# EAGLE board PartiBadge-v2 (EAGLE 9.1.0)
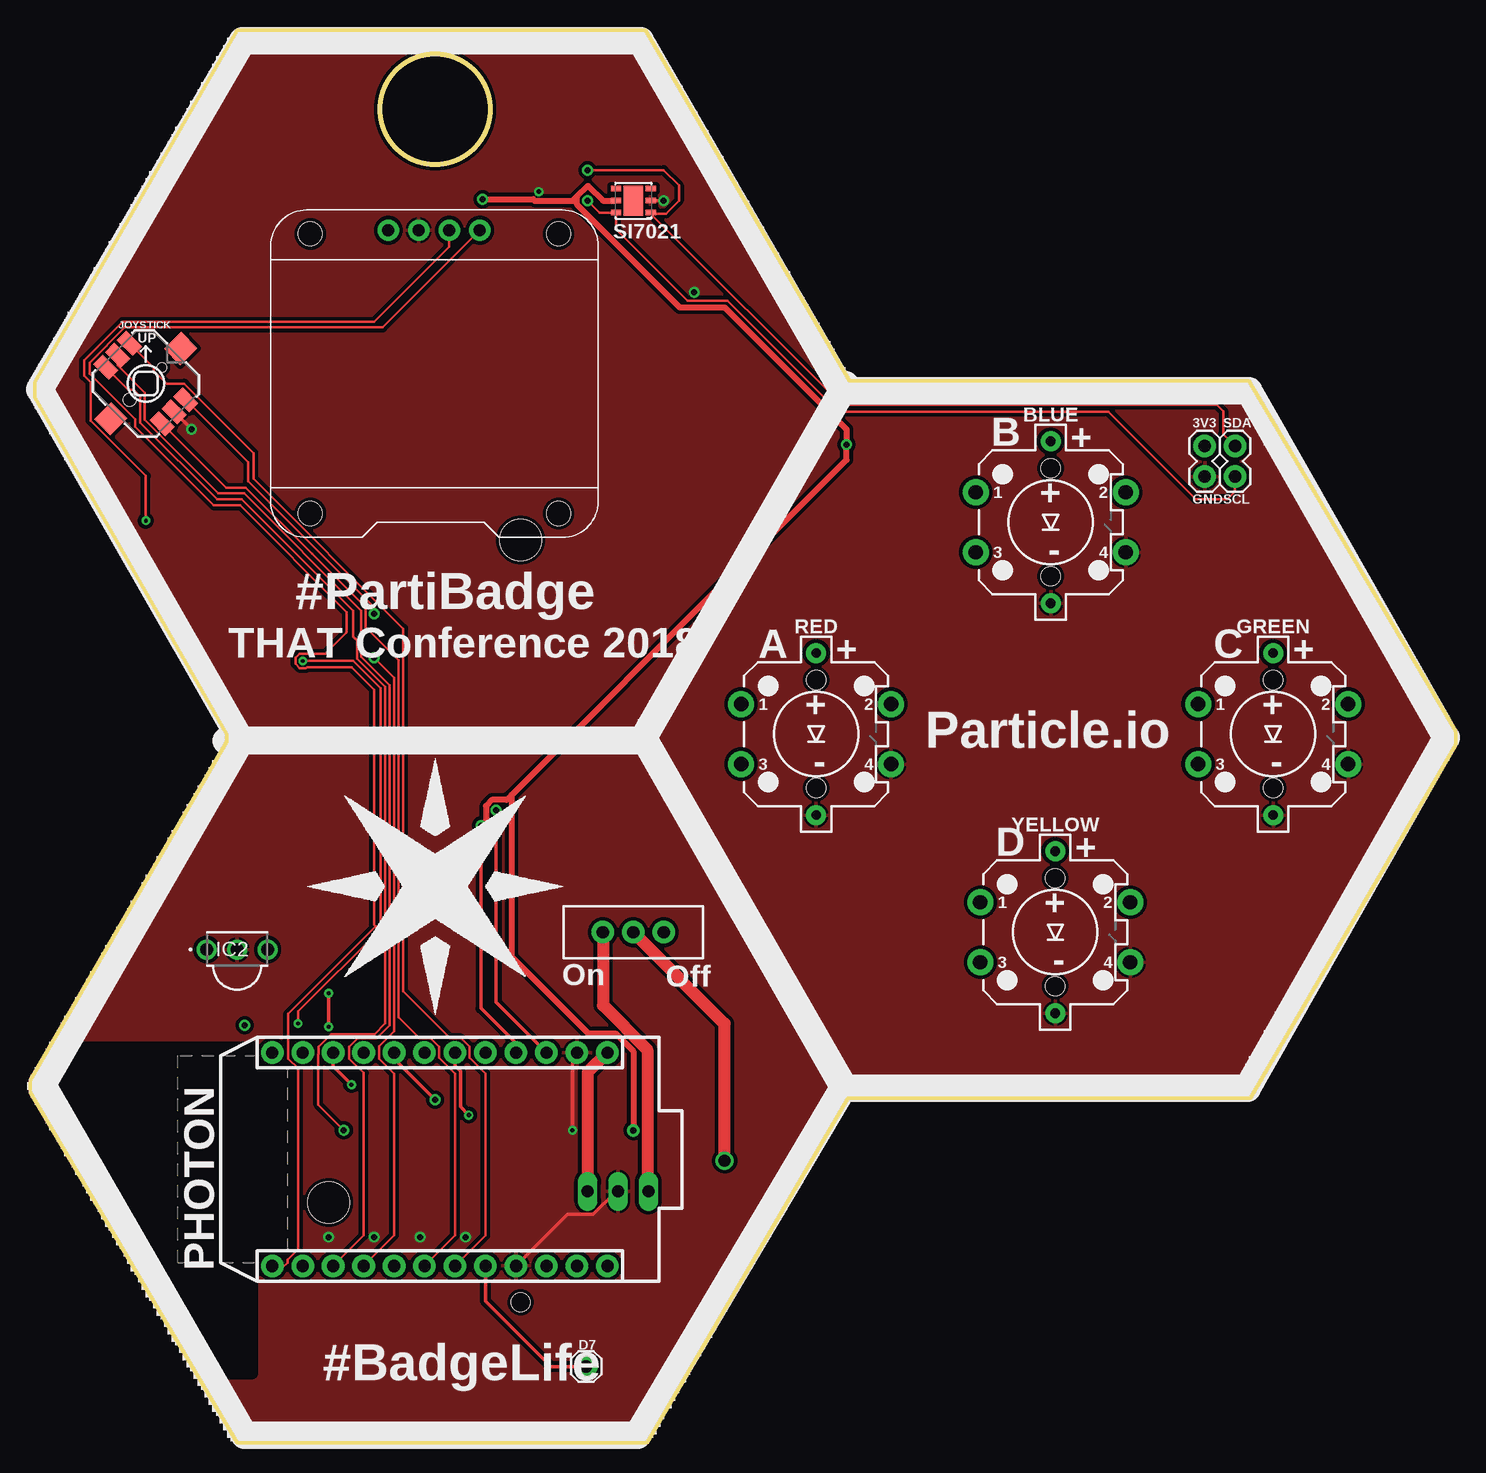
[diagram p0: board, top side]
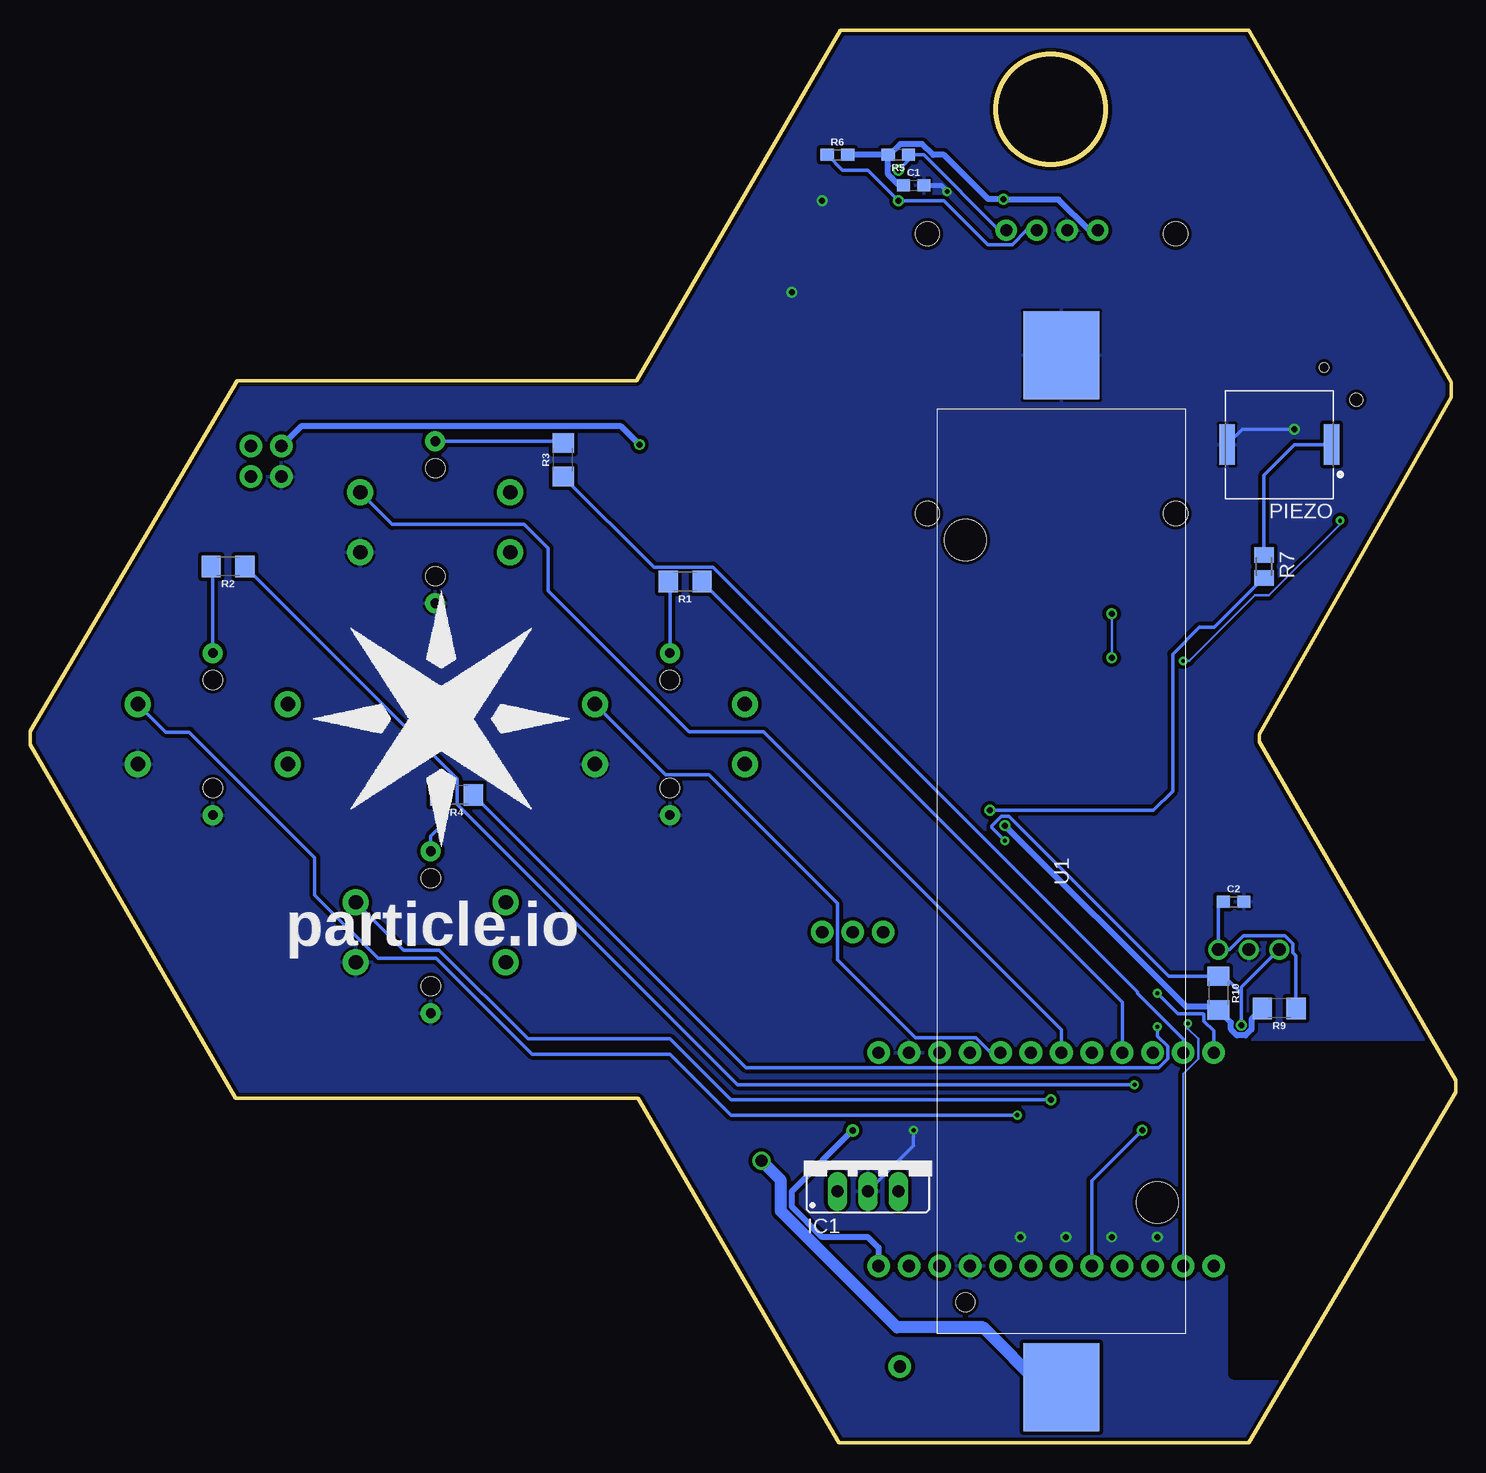
[diagram p1: board, bottom side, seen from below]

Size 118.87 x 117.73 mm. Coordinates in mm from the lower left corner, seen from the top.
Outline: 16.38,59.05 0.38,87.12 0.38,88.39 17.27,117.73 51.31,117.73 68.33,88.52 101.6,88.52 118.87,59.31 118.87,58.17 101.73,28.7 68.2,28.7 51.44,0 17.27,0 0,29.21 0,30.23 16.38,58.42 16.38,59.05
Outline: circle at 33.78,111.12 radius 4.58
Copper layers (1+2*15+16): Top 0.018mm / dielectric 0.195mm / Route2 0.035mm / dielectric 1.1mm / Route15 0.035mm / dielectric 0.195mm / Bottom 0.018mm
Design rules "spark-4layer": minimum track width 6mil, minimum drill 0.3mm, track to track 6mil, track to pad 6mil, pad to pad 6mil, via to via 6mil, smd to smd 6mil, copper to edge 6mil, drill to drill 6mil, minimum pad ring 12mil, minimum via ring 8mil, stop-mask expansion 4mil, vias tented up to drill 20mil, thermal gap 8mil
tRestrict: area -0.5,5.7 to 18.5,33; area -0.5,5.7 to 18.5,33
bRestrict: area -0.5,5.7 to 18.5,33

## Footprints (pad centres in the part's own frame; a part is rotated, then mirrored left to right if it is on the bottom)
TACTILE_SWITCH_LED_PTH_12MM_KIT = drill 1.2 pad 2.159: 1 -6.25,2.5; 2 6.25,2.5; 3 -6.25,-2.5; 4 6.25,-2.5 | drill 0.8 pad 1.676: A 0,6.75; C 0,-6.75 | hole 1.6: 0,4.5; 0,-4.5
0603 = smd 1.1 x 1: 1 -0.85,0; 2 0.85,0
1X01 = drill 1.016 pad 1.88: 1 0,0
78XXS = drill 1.016 long: GND 0,-2.54; IN -2.54,-2.54; OUT 2.54,-2.54
TSMP58000 = drill 1.06 pad 1.6: 1 -2.54,-1.45; 2 0,-1.45; 3 2.54,-1.45
1X02 = drill 1.016 pad 1.88: 1 0,0; 2 2.54,0
JOYSTICK_MINI = smd 1.85 x 1.1: A -3.325,1.4; B 3.325,1.4; C -3.325,-1.4; CTR -3.325,0; D 3.325,-1.4; GND 3.325,0 | smd 1.9 x 2: NC 0,4.13; NC@0 0,-4.13 | hole 0.75: 0,1.9 | hole 1.05: 0,-1.9
PHOTON = drill 1.016 pad 1.88: 1 1.27,33.02; 2 1.27,30.48; 3 1.27,27.94; 4 1.27,25.4; 5 1.27,22.86; 6 1.27,20.32; 7 1.27,17.78; 8 1.27,15.24; 9 1.27,12.7; 10 1.27,10.16; 11 1.27,7.62; 12 1.27,5.08; 13 19.05,5.08; 14 19.05,7.62; 15 19.05,10.16; 16 19.05,12.7; 17 19.05,15.24; 18 19.05,17.78; 19 19.05,20.32; 20 19.05,22.86; 21 19.05,25.4; 22 19.05,27.94; 23 19.05,30.48; 24 19.05,33.02
XDCR_PKMCS0909E4000-R1 = smd 1.3 x 3.4: 1 -4.35,0; 2 4.35,0
1206 = smd 1.6 x 1.8: 1 -1.4,0; 2 1.4,0
M0805 = smd 1.3 x 1.6: 1 -0.95,0; 2 0.95,0
SWITCH_SPDT_PTH_11.6X4.0MM = drill 1.016 pad 1.88: 1 0,2.54; 2 0,0; 3 0,-2.54
DFN6-3X3 = smd 0.85 x 0.45: 1 -1.45,1; 2 -1.45,0; 3 -1.45,-1; 4 1.45,-1; 5 1.45,0; 6 1.45,1 | smd 1.6 x 2.5: EXP 0,0
KEYSTONE-1042 = smd 7.34 x 6.35: 1 -43,0; 2 43,0 | hole 3.45: -27.6,-8; 27.6,8 | hole 1.57: 35.93,-8
OLED_0.96_I2C = drill 1 pad 1.778: GND -1.63,11.63; SCL 0.91,11.63; SDA 3.45,11.63; VCC -4.17,11.63 | hole 2: -10.67,-11.97; 10.03,-11.97; 10.03,11.33; -10.67,11.33

## Placement (x,y rotation side)
BLUE  MOMENTARY-SWITCH-SPST-LED  [TACTILE_SWITCH_LED_PTH_12MM_KIT]  85.09,76.71 0 top
C1  0.1uF  [0603]  45.21,104.78 0 bottom
C2  4.7uF  [0603]  18.54,45.09 0 bottom
D7  [1X01]  46.36,6.35 0 top
GREEN  MOMENTARY-SWITCH-SPST-LED  [TACTILE_SWITCH_LED_PTH_12MM_KIT]  103.63,59.05 0 top
IC1  [78XXS]  49.02,23.5 0 bottom
IC2  TSMP58000  [TSMP58000]  17.27,42.55 0 top
J1  I2C  [1X02]  100.46,83.06 270 top
J2  Supply  [1X02]  97.92,80.52 90 top
JOYSTICK  [JOYSTICK_MINI]  9.65,88.27 315 top
PARTIFRAME  FRAME-LETTERNO_PACKAGE  [DUMMY]  -4.32,-3.17 0 bottom  (outside the outline)
PHOTON  PHOTON_WITH_HEADERS  [PHOTON]  15.11,33.78 270 top
PIEZO  PKMCS0909E4000-R1  [XDCR_PKMCS0909E4000-R1]  14.73,83.19 180 bottom
R1  200  [1206]  64.26,71.76 180 bottom
R2  33  [1206]  102.36,73.03 180 bottom
R3  200  [1206]  74.42,81.92 90 bottom
R4  200  [1206]  83.31,53.98 180 bottom
R5  2.2k  [0603]  46.48,107.31 180 bottom
R6  2.2k  [0603]  51.56,107.31 0 bottom
R7  200  [M0805]  16,73.03 270 bottom
R9  100  [1206]  14.73,36.2 180 bottom
R10  4.7k  [1206]  19.81,37.47 270 bottom
RED  MOMENTARY-SWITCH-SPST-LED  [TACTILE_SWITCH_LED_PTH_12MM_KIT]  65.53,59.05 0 top
S5  [SWITCH_SPDT_PTH_11.6X4.0MM]  50.29,42.55 90 top
SI7021  SI7021-A10-IM  [DFN6-3X3]  50.29,103.51 180 top
U1  1042  [KEYSTONE-1042]  32.89,47.62 270 bottom
U$1  [SPARK-LOGO]  33.78,46.36 0 top
U$3  [MESH#1PX#SVG]  59.18,59.05 0 top
U$4  [SPARK-LOGO]  84.58,60.33 0 bottom
U$5  OLED_0.96_I2C  [OLED_0.96_I2C]  34.04,89.41 0 top
YELLOW  MOMENTARY-SWITCH-SPST-LED  [TACTILE_SWITCH_LED_PTH_12MM_KIT]  85.47,42.55 0 top

## Library data of the parts
BLUE GREEN RED YELLOW = SparkFun-Switches; PROD_ID: SWCH-11758; SF_SKU: COM-10442
C1 C2 = SparkFun-Capacitors; PROD_ID: CAP-00810
D7 J1 J2 = SparkFun-Connectors
IC1 = v-reg
IC2 = TSMP58000; ARROW_PART_NUMBER: TSMP58000; ARROW_PRICE/STOCK: https://www.arrow.com/en/products/tsmp58000/vishay; DESCRIPTION: Vishay TSMP58000, 40kHz IR Receiver 45 , 5m Range, 2.5V - 5V, Through Hole, 5 x 2.8 x 6.95mm; HEIGHT: mm; MANUFACTURER_NAME: Vishay; MANUFACTURER_PART_NUMBER: TSMP58000; RS_PART_NUMBER: 7730297; RS_PRICE/STOCK: http://uk.rs-online.com/web/p/products/7730297
JOYSTICK = SparkFun-Switches; PROD_ID: SWCH-09905; SF_SKU: COM-10063
PARTIFRAME = SparkFun-Aesthetics; DESIGNER: Brandon Satrom; VERSION: v01
PHOTON = Particle-Devices
PIEZO = PKMCS0909E4000-R1; AVAILABILITY: Good; DESCRIPTION: Audio Sounder Piezo Solder Pad Surface Mount; MF: Murata; MP: PKMCS0909E4000-R1; PACKAGE: 2010 Murata; PRICE: 1.02 USD
R1-R4 R9 R10 = SparkFun-Resistors
R5 R6 = SparkFun-Resistors; PROD_ID: RES-07857
R7 = rcl; SPICEPREFIX: R
S5 = SparkFun-Switches; PROD_ID: SWCH-08261; SF_SKU: COM-00102
SI7021 = si70xx-10; MF: Silicon Labs; MPN: Si7021-A10-IM; OC_FARNELL: 2422573; OC_NEWARK: 55X3113
U1 = 1042; ARROW_PART_NUMBER: 1042; DESCRIPTION: Cylindrical Battery Contacts, Clips, Holders & Springs 18650 S/M PC BATTERY HOLDER; HEIGHT: mm; MANUFACTURER_NAME: Keystone Electronics; MANUFACTURER_PART_NUMBER: 1042
U$1 U$4 = particle-spark
U$3 = ParticleMeshMed
U$5 = tft_1.8_1.44_oled_0.96

## Nets
5V: IC1.OUT PHOTON.1
+3V3: C1.1 J2.2 PHOTON.24 R5.2 R6.2 R9.2 R10.2 SI7021.5 U$5.VCC
BATT: S5.2 U1.2
BUTTON_B: BLUE.2 PHOTON.7
BUTTON_G: GREEN.2 PHOTON.6
BUTTON_R: PHOTON.5 RED.2
BUTTON_Y: PHOTON.8 YELLOW.2
CENT: JOYSTICK.CTR PHOTON.15
D7: D7.1 PHOTON.20
DOWN: JOYSTICK.D PHOTON.18
GND: BLUE.4 BLUE.C C1.2 C2.2 GREEN.4 GREEN.C IC1.GND IC2.2 J2.1 JOYSTICK.GND PHOTON.2 PHOTON.21 PIEZO.2 RED.4 RED.C SI7021.2 U1.1 U$5.GND YELLOW.4 YELLOW.C
IR_RECEIVER: IC2.1 PHOTON.4 R10.1
LED_B: PHOTON.11 R3.1
LED_G: PHOTON.10 R2.1
LED_R: PHOTON.9 R1.1
LED_Y: PHOTON.12 R4.1
LEFT: JOYSTICK.C PHOTON.17
N$1: PHOTON.3 R7.2
N$4: R1.2 RED.A
N$7: GREEN.A R2.2
N$8: BLUE.A R3.2
N$9: C2.1 IC2.3 R9.1
N$10: R4.2 YELLOW.A
N$13: PIEZO.1 R7.1
NC: S5.3
ON: IC1.IN S5.1
RIGHT: JOYSTICK.B PHOTON.16
SCL: J1.2 PHOTON.14 R6.1 SI7021.6 U$5.SCL
SDA: J1.1 PHOTON.13 R5.1 SI7021.1 U$5.SDA
UP: JOYSTICK.A PHOTON.19
VBAT: PHOTON.22

## Tracks (layer width: path | path; a pad name or v marks a point on that pad's centre or on a via)
5V
  Top 1.016: PHOTON.1 46.48,30.86 IC1.OUT
+3V3  (via drill 0.5, 0.55 pad 1.05)
  Top 0.508: SI7021.5 47.75,103.51 46.54,104.72 46.48,104.72 45.62,103.86 | 40.13,53.98 59.18,73.03 68.07,81.92 v68.07,83.19 68.07,84.45 57.91,94.62 54.16,94.62 46.54,102.23 45.62,103.15 45.62,103.86 | v50.29,26.04 50.29,32.62 48.8,34.11 46.53,34.11 40.13,40.51 40.13,53.98 | 40.13,53.98 39.72,53.57 38.51,53.57 38,53.06 38,51.85 v37.59,51.44 | v37.72,103.63 41.94,103.63 42.09,103.48 45.24,103.48 45.62,103.86
  Bottom 0.305: 47.5,107.48 R5.2 | 50.55,107.48 R6.2
  Bottom 0.406: R10.2 20.07,36.33
  Bottom 0.508: v37.59,51.44 22.48,36.33 20.07,36.33 | PHOTON.24 48.13,16.26 49.02,17.14 52.83,17.14 55.37,19.68 55.37,20.95 v50.29,26.04 | R10.2 18.77,35.02 18.77,34.44 18.26,33.94 17.55,33.94 17.05,34.44 17.05,35.28 R9.2 | U$5.VCC 30.57,101.04 33.14,103.6 37.69,103.6 v37.72,103.63 38.99,103.63 42.67,107.31 43.57,107.31 44.48,108.22 46.35,108.22 47.26,107.31 R5.2 | J2.2 96.27,84.7 69.59,84.7 v68.07,83.19 | R5.2 47.5,107.48 | R5.2 50.38,107.31 50.55,107.48 | R5.2 47.33,106.41 47.34,106.4 47.34,105.69 46.43,104.78 C1.1
BATT  (via drill 1)
  Top 1.016: v57.91,23.5 57.91,34.93 S5.2
  Bottom 1.016: v57.91,23.5 56.29,21.87 56.29,19.31 46.59,9.61 39.41,9.61 34.42,4.62 U1.2
BUTTON_B
  Bottom 0.305: BLUE.2 88.67,76.54 77.69,76.54 75.68,74.53 75.68,70.99 63.92,59.23 57.71,59.23 32.89,34.42 PHOTON.7
BUTTON_G  (via drill 0.35)
  Top 0.305: v36.58,27.3 35.89,27.99 35.89,30.94 35.43,31.4 PHOTON.6
  Bottom 0.305: GREEN.2 107.54,59.22 105.59,59.22 95.14,48.77 95.14,45.64 89.86,40.37 85,40.37 77.02,32.39 65.53,32.39 60.45,27.3 v36.58,27.3
BUTTON_R
  Bottom 0.305: RED.2 65.89,55.66 62.28,55.66 51.57,44.95 51.57,40.25 45.08,33.76 40,33.76 38.75,32.51 PHOTON.5
BUTTON_Y  (via drill 0.5)
  Top 0.305: PHOTON.8 30.35,32 v33.78,28.57
  Bottom 0.305: YELLOW.2 87.73,41.05 84.76,41.05 77.36,33.66 65.53,33.66 60.45,28.57 v33.78,28.57
CENT
  Top 0.203: PHOTON.15 27.81,17.27 27.81,30.82 26.62,32.02 26.62,33.01 27.32,33.71 28.88,33.71 29.97,34.8 29.97,63.14 27.61,65.5 27.61,69.35 17.84,79.12 15.68,79.12 9.56,85.24 9.56,87.51 7.3,89.77 JOYSTICK.CTR
D7
  Top 0.305: D7.1 43.43,6.35 37.97,11.81 PHOTON.20
DOWN
  Top 0.203: PHOTON.18 35.43,17.27 35.43,30.75 34.09,32.1 34.09,33.01 33.39,33.71 32.48,33.71 30.73,35.45 30.73,62.87 30.73,65.2 27.97,67.97 27.97,69.62 23.52,74.07 18,79.59 16.35,79.59 JOYSTICK.D
GND  (via drill 0.35, 0.5)
  Top 0.305: JOYSTICK.GND v13.46,84.45 | v13.46,84.45 | SI7021.2 v52.83,103.51 | PHOTON.21 44.81,19.02 46.95,19.02 48.88,20.95 IC1.GND | v45.21,26.04 45.21,32.13 PHOTON.2
  Bottom 0.305: v13.46,84.45 17.81,84.45 PIEZO.2 | IC1.GND 45.21,24.77 v45.21,26.04
  Bottom 0.406: C1.2 42.93,104.78 v42.42,104.27
  other vias: 24.89,17.14 28.7,17.14 32.51,17.14 36.32,17.14 55.37,95.89
  pour Bottom (isolate 0.305): 14.73,120.02 51.56,120.02 106.17,88.27 127.76,51.44 70.61,-4.45 18.54,-4.45 -4.32,29.85 -4.32,88.27
  pour Top (isolate 0.305): 0.76,120.02 78.23,120.02 121.41,76.84 118.87,24.77 51.56,-1.9 16,-1.9 -4.32,29.85
IR_RECEIVER  (via drill 0.35, 0.5)
  Top 0.305: PHOTON.4 40.51,33.27 37.59,36.2 v37.59,50.17
  Bottom 0.305: v17.91,34.8 17.91,37.47 | 17.91,37.47 17.91,37.97 14.78,41.1 IC2.1 | 17.91,37.47 19.31,38.87 R10.1 23.95,38.87 37.28,52.19 37.91,52.19 38.66,51.44 38.66,51.24 v37.59,50.17
LED_B
  Bottom 0.305: R3.1 66.87,72.96 61.94,72.96 26.57,37.59 26.57,37.46 22.73,33.63 PHOTON.11
LED_G  (via drill 0.35)
  Top 0.305: v26.8,29.85 25.27,31.37 PHOTON.10
  Bottom 0.305: R2.1 83.27,55.33 83.27,53.2 59.91,29.85 v26.8,29.85
LED_R
  Bottom 0.305: PHOTON.9 27.81,36.71 R1.1
LED_Y  (via drill 0.35)
  Top 0.305: v24.89,34.67 v24.89,37.47
  Bottom 0.305: R4.1 59.2,31.27 24.76,31.27 24.03,32 24.03,33.03 24.89,33.89 v24.89,34.67 | PHOTON.12 20.19,34.32 21.02,35.14 21.02,35.7 21.08,35.77 23.19,35.77 v24.89,37.47
LEFT  (via drill 0.5)
  Top 0.203: JOYSTICK.C 8.19,87.75 8.65,87.75 9.21,87.2 9.21,85 15.6,78.61 17.65,78.61 26.95,69.32 26.95,67.18 27.26,66.88 27.26,65.35 29.62,62.99 29.62,34.95 28.73,34.06 25.7,34.06 25.68,34.04 25.11,34.04 24.08,33.01 24.08,32.44 24.03,32.39 24.03,32 24.03,28.17 v26.16,26.04
  Bottom 0.305: PHOTON.17 30.35,21.84 v26.16,26.04
N$1  (via drill 0.5)
  Top 0.305: v38.86,52.71 38.86,36.7 PHOTON.3
  Bottom 0.305: v38.86,52.71 25.21,52.71 23.62,54.3 23.62,65.73 21.4,67.95 20.13,67.95 R7.2
N$4
  Bottom 0.305: RED.A 65.53,71.62 R1.2
N$7
  Bottom 0.305: GREEN.A 103.63,72.89 R2.2
N$8
  Bottom 0.305: BLUE.A 74.56,83.46 R3.2
N$9
  Bottom 0.305: R9.1 13.33,40.57 13.59,40.83 13.59,41.57 14.26,42.23 17.74,42.23 18.88,41.1 IC2.3 19.81,44.67 C2.1
N$10
  Bottom 0.305: YELLOW.A 85.47,50.55 84.58,51.44 84.58,53.85 R4.2
N$13
  Bottom 0.305: R7.1 16,80.64 13.46,83.19 PIEZO.1
ON
  Top 1.016: S5.1 47.75,36.45 51.48,32.72 51.48,21.04 IC1.IN
RIGHT  (via drill 0.5)
  Top 0.203: v28.7,65.41 30.35,63.75 30.35,34.27 29.85,33.77 29.11,33.03 29.11,32 30.35,30.75 30.35,17.27 PHOTON.16 | JOYSTICK.B 18.17,81.72 18.17,80.14 28.7,69.61 v28.7,69.09
  Bottom 0.203: v28.7,65.41 v28.7,69.09
SCL  (via drill 0.3, 0.5)
  Top 0.203: v46.48,103.51 47.48,102.51 SI7021.6 48.84,101.14 54.81,95.17 58.14,95.17 67.39,85.93 89.88,85.93 97.17,78.64 99.83,78.64 100.46,79.27 J1.2 | U$5.SCL 34.95,99.66 28.7,93.41 7.71,93.41 4.51,90.21 4.51,88.9 5.05,88.36 5.05,85.18 9.65,80.58 v9.65,76.84 | v22.73,65.15 26.92,65.15 29.21,62.87 29.21,42.8 22.35,35.94 v22.35,34.93
  Bottom 0.203: PHOTON.14 22.73,30.75 21.49,32 21.49,33.66 22.35,34.52 v22.35,34.93 | v9.65,76.84 9.65,76.54 15.58,70.61 16.76,70.61 22.23,65.15 v22.73,65.15
  Bottom 0.305: R6.1 51.14,106.05 49.02,106.05 47.75,104.78 v46.48,103.51 42.67,103.51 39.01,99.84 36.99,99.84 | U$5.SCL 35.8,101.04 36.99,99.84 | 36.99,99.84
SDA  (via drill 0.5)
  Top 0.203: v46.48,106.05 52.83,106.05 54.1,104.78 54.1,103.51 53.03,102.44 51.74,102.44 67.67,86.51 68.07,86.51 98.93,86.51 99.46,85.98 99.46,84.06 J1.1 | U$5.SDA 29.4,92.95 7.9,92.95 4.96,90.02 4.96,89.09 8.75,85.31 8.75,84.68 15.33,78.11 17.53,78.11 26.42,69.22 26.42,67.56 26.35,67.5 24.61,65.76 22.48,65.76 22.13,65.4 22.13,64.9 22.48,64.54 22.98,64.54 23.08,64.64 26.8,64.64 28.7,62.74 28.7,43.18 28.83,43.05 21.54,35.76 21.54,32.02 22.35,31.21 22.35,16.11 21.49,15.25 21.49,15.01 21.08,14.61 20.95,14.73 PHOTON.13
  Top 0.305: 51.74,102.44 SI7021.1
  Bottom 0.305: v46.48,106.05 45.63,106.89 R5.1 44.36,107.31 38.09,101.04 U$5.SDA
UP
  Top 0.203: JOYSTICK.A 10.32,89.58 10.32,89.33 11.39,88.25 12.85,88.25 18.63,82.47 18.63,80.33 31.12,67.84 31.12,37.61 35.02,33.71 35.93,33.71 36.63,33.01 36.63,32.1 37.97,30.75 37.97,17.27 PHOTON.19

## Text on the board
tPlace: 3V3 | SDA | B | GND | SCL | #PartiBadge | THAT Conference 2018 | A | C | Particle.io | D | On | Off | #BadgeLife
bPlace: particle.io
Reference: NOTES: | 1. | MATERIAL: MAKE FROM EPOXY GLASS (NEMA-GR-FR4, | SOLDERMASK COLOR -- MATTE BLACK) | 2 LAYERS | 2. | PLATING: | ENIG GOLD | Layer Stackup: | Top Silkscreen | Top Soldermask | Top Copper (1 Oz.) | 0.062" FR4 | Bottom Copper (1 Oz.) | Bottom Soldermask | Bottom Silkscreen